# Altium PCB RasPiHAT-SOUND.PcbDoc
Units mil, origin at the board's own origin, x right, y up, seen from the top; angles counter-clockwise.
Board outline 2560 x 2205 mil, 2 copper layers (Top, Bottom), stack 61.811 mil thick; 21 components, 19 nets, 136 pads, 16 vias.
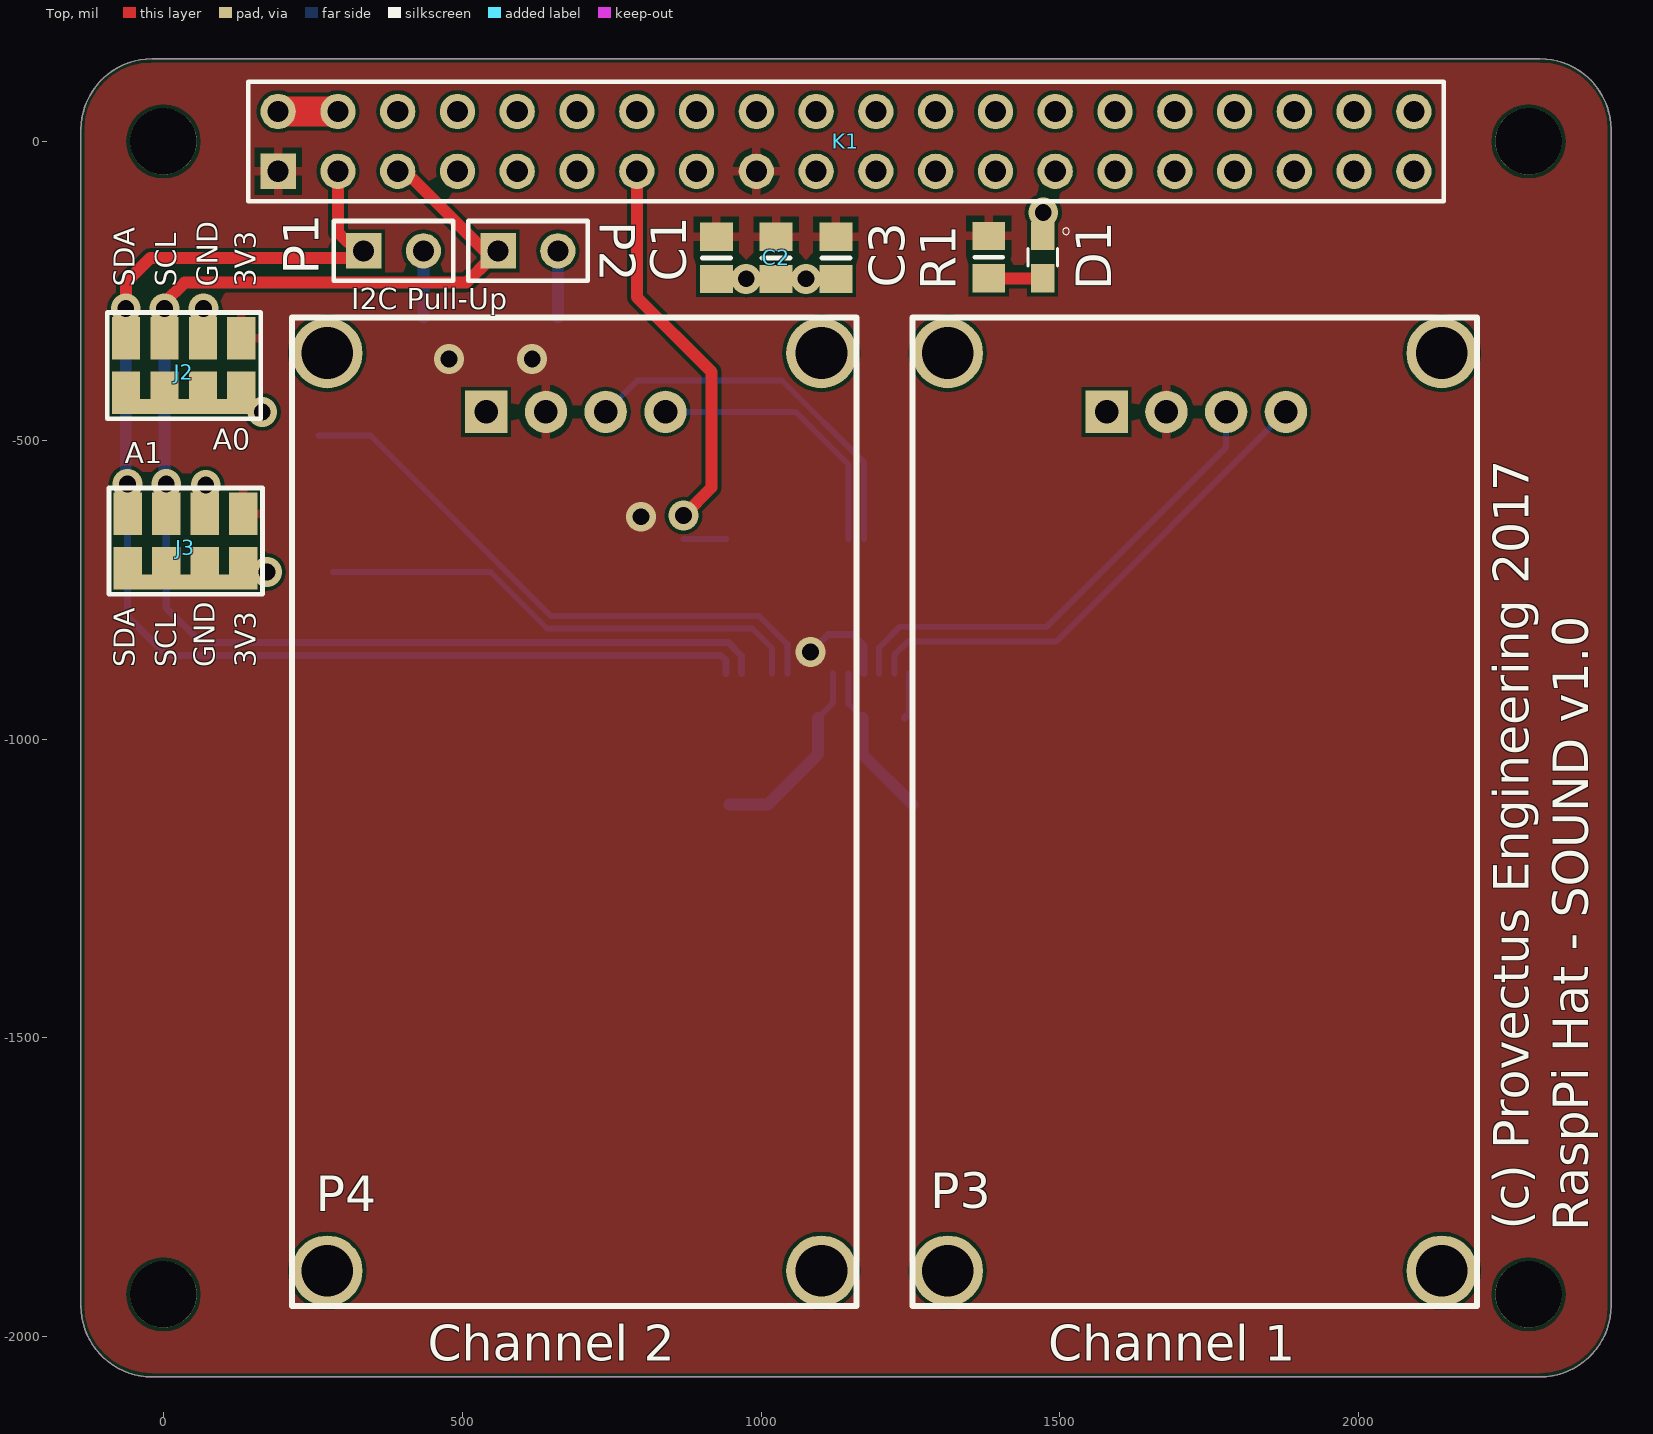
[diagram p0: Top view]
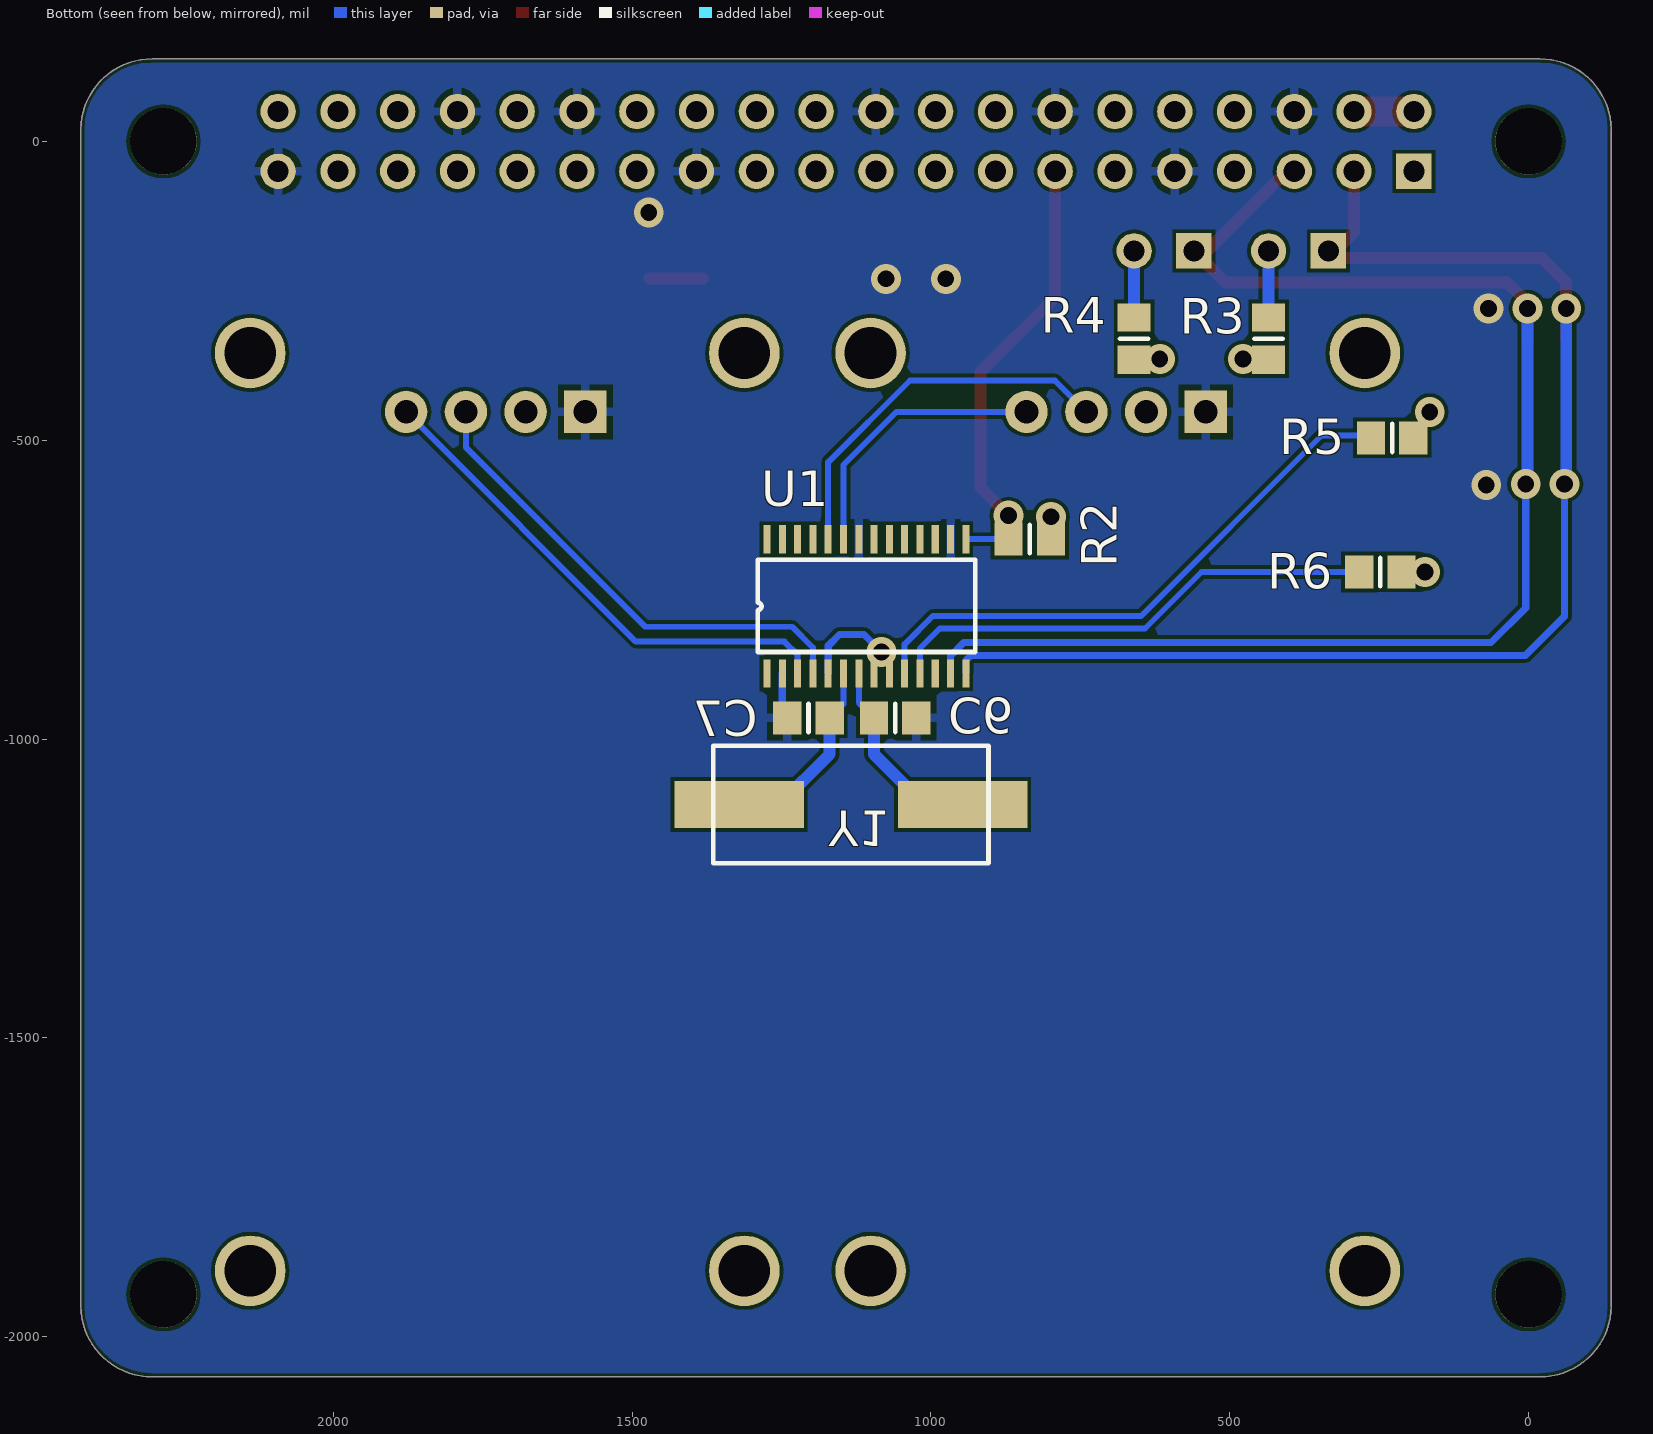
[diagram p1: Bottom view, seen from below]

## Layer stack, top to bottom
Top Solder: solder mask 0.4, Solder Resist, Dk 3.5
Top: signal copper 1.378
Dielectric 1: core 59.0551, FR-4, Dk 4.8
Bottom: signal copper 1.378
Bottom Solder: solder mask 0.4, Solder Resist, Dk 3.5

## Board outline
-138,-1948 -138,20 cw(c-19.5,19.5) -19,138 2303,138 cw(c2303.5,19.5) 2422,20 2422,-1948 cw(c2303,-1948) 2303,-2067 -19,-2067 cw(c-19,-1948)

## Design rules (kind name [scope] priority, off if disabled: settings)
Clearance mdViaVia [IsVia vs IsVia] p1: gap=6
Clearance mdPadVia [IsPad vs IsVia] p2: gap=6
Clearance mdPadPad [IsPad vs IsPad] p3: gap=6
Clearance mdWireVia [(InLayerClass('Signal Layers') AND IsTrack) vs IsVia] p4: gap=6
Clearance mdWirePad [(InLayerClass('Signal Layers') AND IsTrack) vs IsPad] p5: gap=6
Clearance mdWireWire [(InLayerClass('Signal Layers') AND IsTrack) vs (InLayerClass('Signal Layers') AND IsTrack)] p6: gap=6
Clearance [All] p7: gap=6
HoleSize [All] p1: absolutevalues=TRUE maxlimit=100000 minlimit=12 maxpercent=80.000 minpercent=20.000
HoleToHoleClearance [All] p1: gap=8 allowstackedmicrovias=TRUE
PlaneConnect [All] p1: planeconnectstyle=Relief reliefexpansion=20 reliefentries=4 reliefconductorwidth=15 reliefairgap=10
PolygonConnect ThermalVias [IsVia] p1: connectstyle=Direct reliefconductorwidth=10 reliefentries=4 polygonreliefangle="90 Angle" airgapwidth=10
PolygonConnect [All] p2: connectstyle=Relief reliefconductorwidth=15 reliefentries=4 polygonreliefangle="90 Angle" airgapwidth=10
RoomDefinition RasPiHAT-SOUND [InComponentClass('RasPiHAT-SOUND')] p1 off: confinementstyle=ConfineIn formatcopy=TRUE lockcomponents=FALSE outline -141,144 -141,-2080 2436,-2080 2436,144
RoutingVias [All] p1: holewidth=28 width=50 viastyle="Through Hole" minholewidth=28 minwidth=50 maxholewidth=28 maxwidth=50
SilkToSilkClearance [All] p1 off: silktosilkclearance=10
SilkToSolderMaskClearance [IsPad] p1 off: minsilkscreentomaskgap=10 clearancetoexposedcopper=TRUE
SolderMaskExpansion [All] p1: expansion=2
Width [All] p1: maxlimit=100000 minlimit=6 preferedwidth=10
25 further rules are at their usual default settings.

## Components (designator, comment, footprint, x,y, rotation, side; value= is the part's Value field where it differs from the comment)
C1 "Cap" 6-0805_N 925,-195 r90 top
C2 "Cap" 6-0805_N 1025,-195 r90 top
C3 "Cap" 6-0805_N 1125,-195 r90 top
C6 "Cap" 6-0805_N 1059.8,-964.39 r0 bottom
C7 "Cap" 6-0805_N 1204.8,-964.39 r0 bottom
D1 "0805_LED" LEDSC200X125X70-2N_598-8160-107F(Primary) 1470.83,-193.66 r270 top
J2 "Shortable Link (4 Way)" ShortableLink(4Way) 31.93,-371.42 r90 top
J3 "Shortable Link (4 Way)" ShortableLink(4Way) 35,-665 r90 top
K1 "PIN20X2" HDR2X20 192,-50 r0 top
P1 "Header 2" HDR1X2 335,-183.19 r0 top
P2 "Header 2" HDR1X2 560,-183.19 r0 top
P3 "Catalex MP3" YX5300_UART 1253,-295 r90 top
P4 "Catalex MP3" YX5300_UART 215,-295 r90 top locked
R1 "Res1" 6-0805_N 1380.83,-193.66 r270 top
R2 "Res1" 6-0805_N 834.65,-665.35 r0 bottom
R3 "Res1" 6-0805_N 435,-330 r90 bottom
R4 "Res1" 6-0805_N 660,-330 r90 bottom
R5 "Res1" 6-0805_N 228.35,-496.06 r0 bottom
R6 "Res1" 6-0805_N 248.03,-720.47 r0 bottom
U1 "SC16IS752" TSSOP28-65P 1095,-890 r90 bottom
Y1 "11.0592MHz" "SMD Crystal" 1133.8,-1109.39 r0 bottom

## Footprints (in the part's own frame and the unit in brackets; to place one, negate y for a bottom-side part, rotate by r counter-clockwise, add the part's x,y. Pads: shape width x height; smd on the part's side, far side on the other; paste and mask are expansions set on the pad)
6-0805_N [mm] "Chip Resistor, Body 2.0x1.2mm, IPC Medium Density"
  rect 1.2x1.4 smd: 1(-0.9,0) 2(0.9,0)
  silkscreen extent 0,-0.6 0,0.6, body extent -1.07,-0.7 1.07,0.7, height 0.7
HDR1X2 [mm] "Connector; Header; 2 Position"
  rect 1.5x1.5 hole 0.9: 1(0,0)
  round 1.5 hole 0.9: 2(2.54,0)
  silkscreen extent -1.27,-1.27 3.81,1.27
HDR2X20 [mm] "Connector; Header; 20x2 Position"
  rect 1.5x1.5 hole 0.9: 1(0,0)
  round 1.5 hole 0.9: 2(0,2.54) 3(2.54,0) 4(2.54,2.54) 5(5.08,0) 6(5.08,2.54) 7(7.62,0) 8(7.62,2.54) 9(10.16,0) 10(10.16,2.54) 11(12.7,0) 12(12.7,2.54) 13(15.24,0) 14(15.24,2.54) 15(17.78,0) 16(17.78,2.54) 17(20.32,0) 18(20.32,2.54) 19(22.86,0) 20(22.86,2.54) 21(25.4,0) 22(25.4,2.54) 23(27.94,0) 24(27.94,2.54) 25(30.48,0) 26(30.48,2.54) 27(33.02,0) 28(33.02,2.54) 29(35.56,0) 30(35.56,2.54) 31(38.1,0) 32(38.1,2.54) 33(40.64,0) 34(40.64,2.54) 35(43.18,0) 36(43.18,2.54) 37(45.72,0) 38(45.72,2.54) 39(48.26,0) 40(48.26,2.54)
  silkscreen extent -1.27,-1.27 49.53,3.81
LEDSC200X125X70-2N_598-8160-107F(Primary) [mm]
  rect 1.2x1 smd paste-25.4 mask-25.4: A(0.9,0) C(-0.9,0)
  silkscreen extent -1.24,-0.63 0.38,1.14
ShortableLink(4Way) [mm]
  rect 0.635x5.08 smd mask+0: 1(-1.829,-0.051)
  rect 1.8x1.2 smd mask+0.102: 1(-1.245,2.4)
  rect 1.8x1.2 smd: 1(-1.245,-0.867) 1(-1.245,0.766) 1(-1.245,-2.5) 2(1.067,2.4) 3(1.067,0.767) 4(1.067,-0.867) 5(1.067,-2.5)
  silkscreen extent -2.35,-3.33 2.16,3.2
"SMD Crystal" [mm]
  rect 5.5x2 smd: 1(-4.75,0) 2(4.75,0)
  silkscreen extent -5.85,-2.5 5.85,2.5
TSSOP28-65P [mm]
  rect 1.2x0.3 smd: 1(0,4.55) 2(0,3.9) 3(0,3.25) 4(0,2.6) 5(0,1.95) 6(0,1.3) 7(0,0.65) 8(0,0) 9(0,-0.65) 10(0,-1.3) 11(0,-1.95) 12(0,-2.6) 13(0,-3.25) 14(0,-3.9) 15(5.7,-3.9) 16(5.7,-3.25) 17(5.7,-2.6) 18(5.7,-1.95) 19(5.7,-1.3) 20(5.7,-0.65) 21(5.7,0) 22(5.7,0.65) 23(5.7,1.3) 24(5.7,1.95) 25(5.7,2.6) 26(5.7,3.25) 27(5.7,3.9) 28(5.7,4.55)
  silkscreen extent 0.91,-4.3 4.83,4.95
YX5300_UART [mm]
  rect 1.8x1.8 hole 1: 1(-4,-8.255)
  round 1.8 hole 1: 2(-4,-10.795) 3(-4,-13.335) 4(-4,-15.875)
  round 3 hole 2.2: ""(-40.5,-22.5) ""(-40.5,-1.5) ""(-1.5,-1.5) ""(-1.5,-22.5)
  silkscreen extent -42,-24 0,0

## Part data
C1 C2 C3 C6 C7: "Capacitor"
D1: library part 598-8160-107F, "LED, SMD; 0805; Yellow-Green; Water Clear Lens; 40mcd; 570/575nm"
P1 P2: "Header, 2-Pin"
P3 P4: library part "Header 4", "Header, 4-Pin"
R1 R2 R3 R4 R5 R6: "Resistor"
U1: library part SC16IS752IPW, "I2C to UART Interface (2 Channels)"
Y1: library part XTAL, "Crystal Oscillator"

## Free pads (board coordinates)
  round 111 hole 111: 1(0,-1929) 1(0,0) 1(2284,-1929) 1(2284,0)

## Via types
v1: diameter 50, hole 28, Top to Bottom, 16 vias

## Nets (pads, with @x,y where several pads share a name; then routed paths per layer and width w, separated by ;. In a path a pad name is that pad's centre, name@x,y a point inside that pad or via, vN(x,y) a via of type N, cw(c..) or ccw(c..) an arc to the next point about the centre after c; other vN are vias at no path point)
+3V3: C1.2 C2.2 C3.2 J2.5 J3.5 K1.1 K1.17 P3.2 P4.2 R1.1 R2.1 R3.1 R4.1 U1.5 U1.8 U1.9 | length 155.1
  Bottom w12: v1(1082.68,-854.25) 1111.93,-825 1152.88,-825 1171.77,-843.89 U1.5
  other v1: 799.21,-627.95 478,-364 617,-364
+5V: K1.2 K1.4 | length 100
  Top w50: K1.2 K1.4
GND: C1.1 C2.1 C3.1 C6.1 C7.2 D1.C J2.4 J3.4 K1.6 K1.9 K1.14 K1.20 K1.25 K1.30 K1.34 K1.39 P3.1 P4.1 U1.2 U1.16 U1.22 | length 77.8
  Bottom w12: C7.2 1248.54,-956.07 U1.2
  other v1: 70.87,-574.8 66.93,-279.53 975,-230 1075,-230 1472,-119
IRQ: K1.13 R2.2 U1.15 | length 718.6
  Top w20: K1.13 792,-260.5 917.32,-385.83 917.32,-578.74 v1(870.08,-625.98)
  Bottom w10: R2.2@870.32,-665.59 U1.15
NetC6_2: C6.2 U1.7 Y1.1 | length 329
  Bottom w10: C6.2 1120.59,-939.02 U1.7
  Bottom w20: Y1.1 1011,-1109.39 1095.23,-1025.16 C6.2
NetC7_1: C7.1 U1.6 Y1.2 | length 263.9
  Bottom w10: U1.6 1146.18,-941.2 C7.1
  Bottom w20: C7.1 1169.36,-1025.16 Y1.2@1253.59,-1109.39
NetD1_A: D1.A R1.2 | length 90
  Top w20: R1.2 D1.A
NetJ2_1: J2.1 R5.1
  other v1: 165.35,-452.76
NetJ3_1: J3.1 R6.1
  other v1: 173.23,-720.47
NetP1_2: P1.2 R3.2 | length 99.6
  Bottom w20: R3.2 P1.2@435,-195
NetP2_2: P2.2 R4.2 | length 99.6
  Bottom w20: R4.2 P2.2@660,-195
NetP3_3: P3.3 U1.4 | length 822.1
  Bottom w10: U1.4 1197.36,-846.64 1232,-812 1478,-812 1778,-512 P3.3
NetP3_4: P3.4 U1.3 | length 854.4
  Bottom w10: U1.3 1222.95,-859.05 1245,-837 1493.48,-837 P3.4
NetP4_3: P4.3 U1.24 | length 639
  Bottom w10: P4.3 792.48,-400 1035,-400 1171.77,-536.77 U1.24
NetP4_4: P4.4 U1.23 | length 467.3
  Bottom w10: P4.4 1057.48,-452.48 1146.18,-541.18 U1.23
NetR5_2: R5.2 U1.10 | length 977.4
  Bottom w10: R5.2@259.84,-492.13 346.46,-492.13 648.33,-794 996.63,-794 1043.82,-841.19 U1.10
NetR6_2: R6.2 U1.11 | length 829.5
  Bottom w10: R6.2 547.24,-720.47 641.77,-815 985,-815 1018.23,-848.23 U1.11
SCL: J2.3 J3.3 K1.5 P2.1 U1.13 | length 2403.2
  Top w20: J2.3 v1(1.75,-279.53) 1.75,-269.91 35.43,-236.22 506.97,-236.22 547.28,-195.91 P2.1@559.09,-195.91 ; K1.5 404.33,-50 550.24,-195.91 P2.1@559.09,-195.91 ; P2.1@560,-195 P2.1@559.09,-195.91
  Bottom w12: v1(4.82,-573.11) 4.82,-780.41 62.99,-838.58 944.88,-838.58 967.05,-860.75 U1.13
  Bottom w20: v1(1.75,-279.53) 1.75,-570.04 v1(4.82,-573.11)
SDA: J2.2 J3.2 K1.3 P1.1 U1.14 | length 2228.5
  Top w20: J2.2 -62.56,-235.79 -21.77,-195 323.19,-195 329.09,-189.09 292,-152 K1.3
  Bottom w12: v1(-59.92,-573.11) -59.92,-794.41 5.67,-860 933,-860 941.22,-868.22 U1.14@941.22,-889.76
  Bottom w20: v1(-62.99,-279.53) -62.99,-570.04 v1(-59.92,-573.11)
pads on no net: K1.7 K1.8 K1.10 K1.11 K1.12 K1.15 K1.16 K1.18 K1.19 K1.21 K1.22 K1.23 K1.24 K1.26 K1.27 K1.28 K1.29 K1.31 K1.32 K1.33 K1.35 K1.36 K1.37 K1.38 K1.40 P3. P4. U1.1 U1.12 U1.17 U1.18 U1.19 U1.20 U1.21 U1.25 U1.26 U1.27 U1.28

## Polygon pours and split planes (outlines as drawn)
+3V3 on Top "3V3" (solid, remove dead copper, pour order 19): -150,150 2450,150 2450,-2100 -150,-2100
GND on Bottom "GND" (solid, remove dead copper, pour order 20): -149.61,157.48 2429.13,157.48 2429.13,-2118.11 2421.26,-2125.98 -153.54,-2125.98 -153.54,149.61 -149.61,153.54

## Keep-outs
Keep-Out Layer:
  the board outline again, w0

## Silkscreen, mask and mechanical layers (free items; w line width, h text height)
Top Overlay:
  text "SDA" at -48.07,-242.8 h35 r90
  text "SCL" at 21.23,-242.8 h35 r90
  text "GND" at 90.54,-242.8 h35 r90
  text "3V3" at 154.84,-242.8 h35 r90
  text "I2C Pull-Up" at 314,-281 h35
  text "A0" at 82.68,-515.75 h35
  text "A1" at -65,-538.19 h35
  text "SDA" at -48.07,-879.61 h35 r90
  text "SCL" at 21.23,-879.61 h35 r90
  text "GND" at 85.54,-879.61 h35 r90
  text "3V3" at 154.84,-879.61 h35 r90
  text "(c) Provectus Engineering 2017" at 2284,-1821 h60 r90
  text "RaspPi Hat - SOUND v1.0" at 2384,-1823 h60 r90
  text "Channel 2" at 442.52,-2040 h60
  text "Channel 1" at 1480.52,-2040 h60
Dimension:
  the board outline again, w0
tRestrict:
  circle w123: c2284,-1929 r62
  circle w123: c0,0 r62
  circle w123: c2284,0 r62
  circle w123: c0,-1929 r62
bRestrict:
  circle w123: c2284,-1929 r62
  circle w123: c0,-1929 r62
  circle w123: c0,0 r62
  circle w123: c2284,0 r62
Unrouted:
  lines w0: 192,-50 992,-50 2036,-675 2304,-412 ; 192,50 292,50 ; 1492,-50 2036,-525 ; 1492,50 2036,-575 ; 1835.2,-895.83 1841.2,-733.83 ; 1865.2,-770.83 2039.2,-879.83 ; 1871.2,-658.83 1939.2,-770.83 2063.2,-770.83 ; 2022.26,-532.68 2216.26,-369.68 ; 2022.26,-482.68 2216.26,-269.68 ; 2290.26,-369.68 2290.26,-269.68